# Altium PCB HIVE_SIGHT _PANEL.PcbDoc
Units mil, origin at the board's own origin, x right, y up, seen from the top; angles counter-clockwise.
Board outline 7000 x 5246.04 mil, 4 copper layers (Top, GND, PWR, Bottom), stack 60.394 mil thick; 8 components, 195 nets, 6 pads, 0 vias.
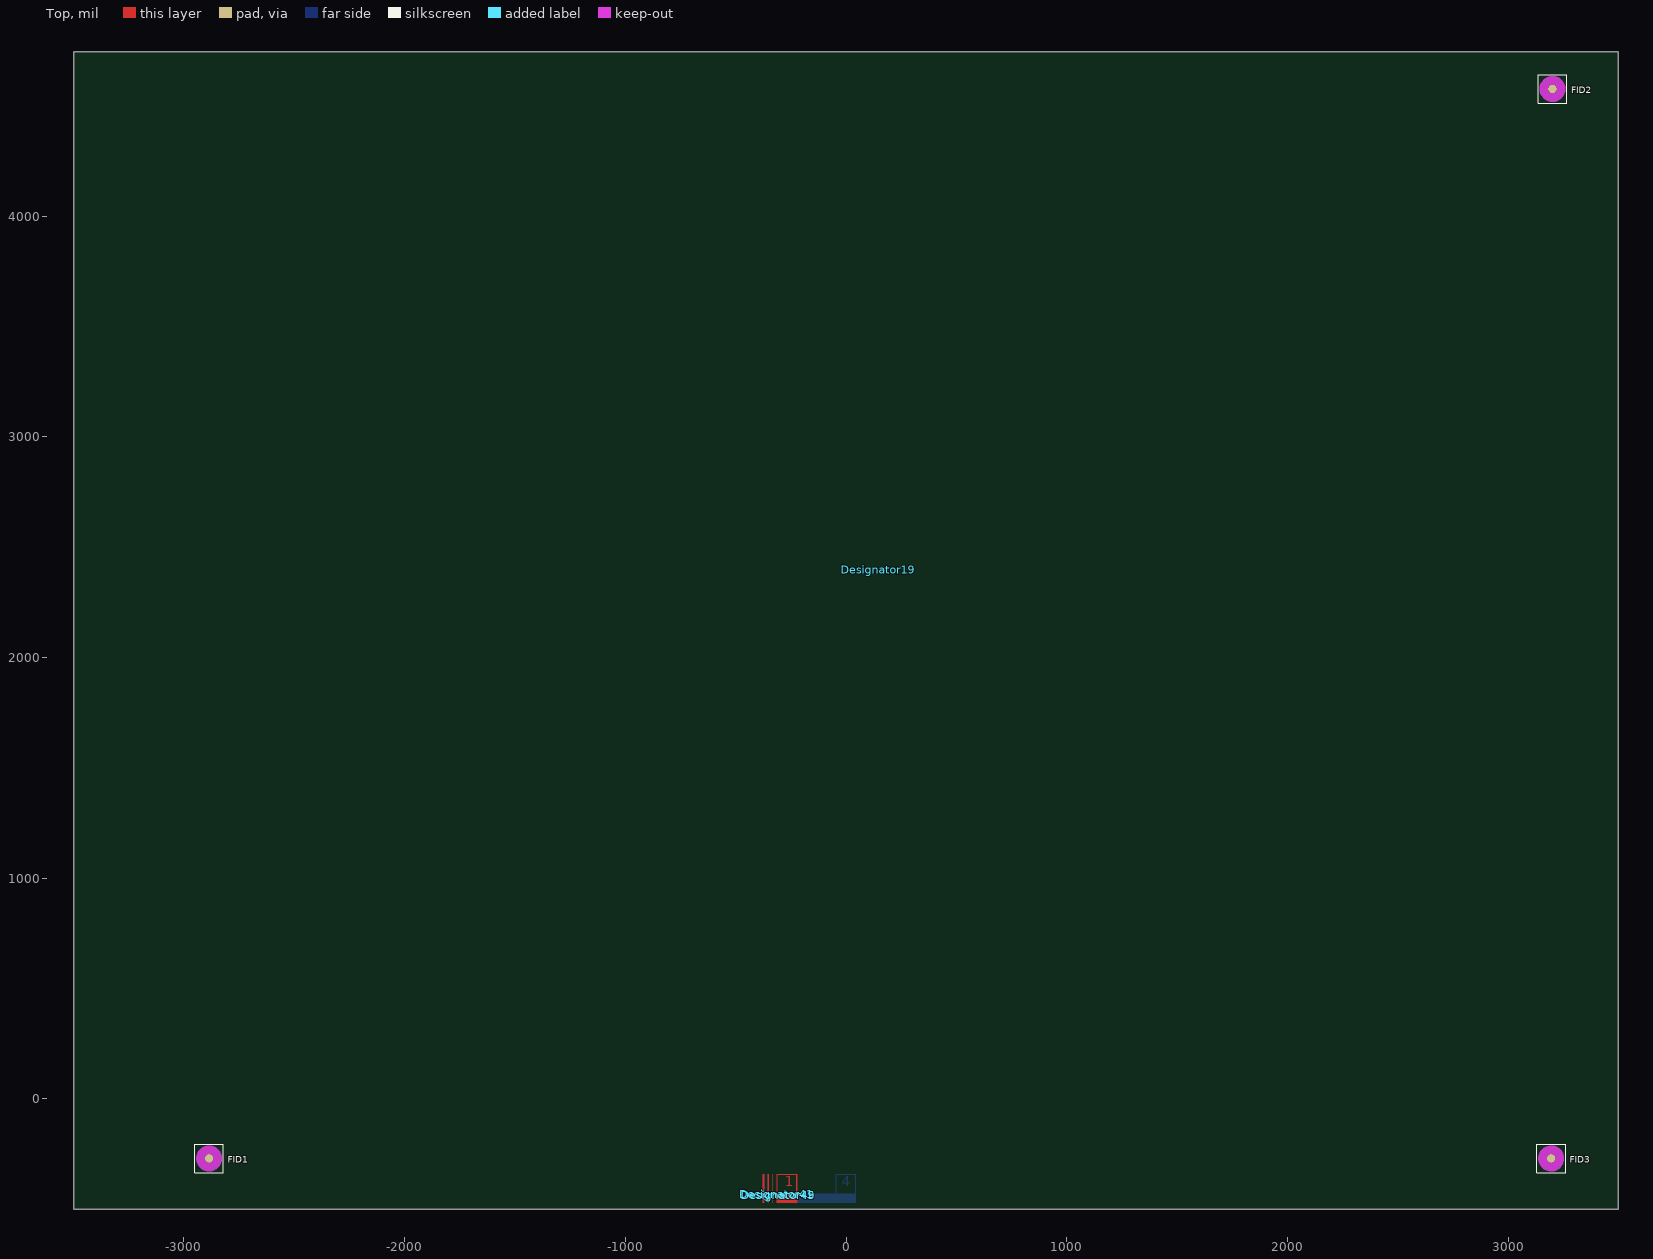
[diagram p0: Top view]
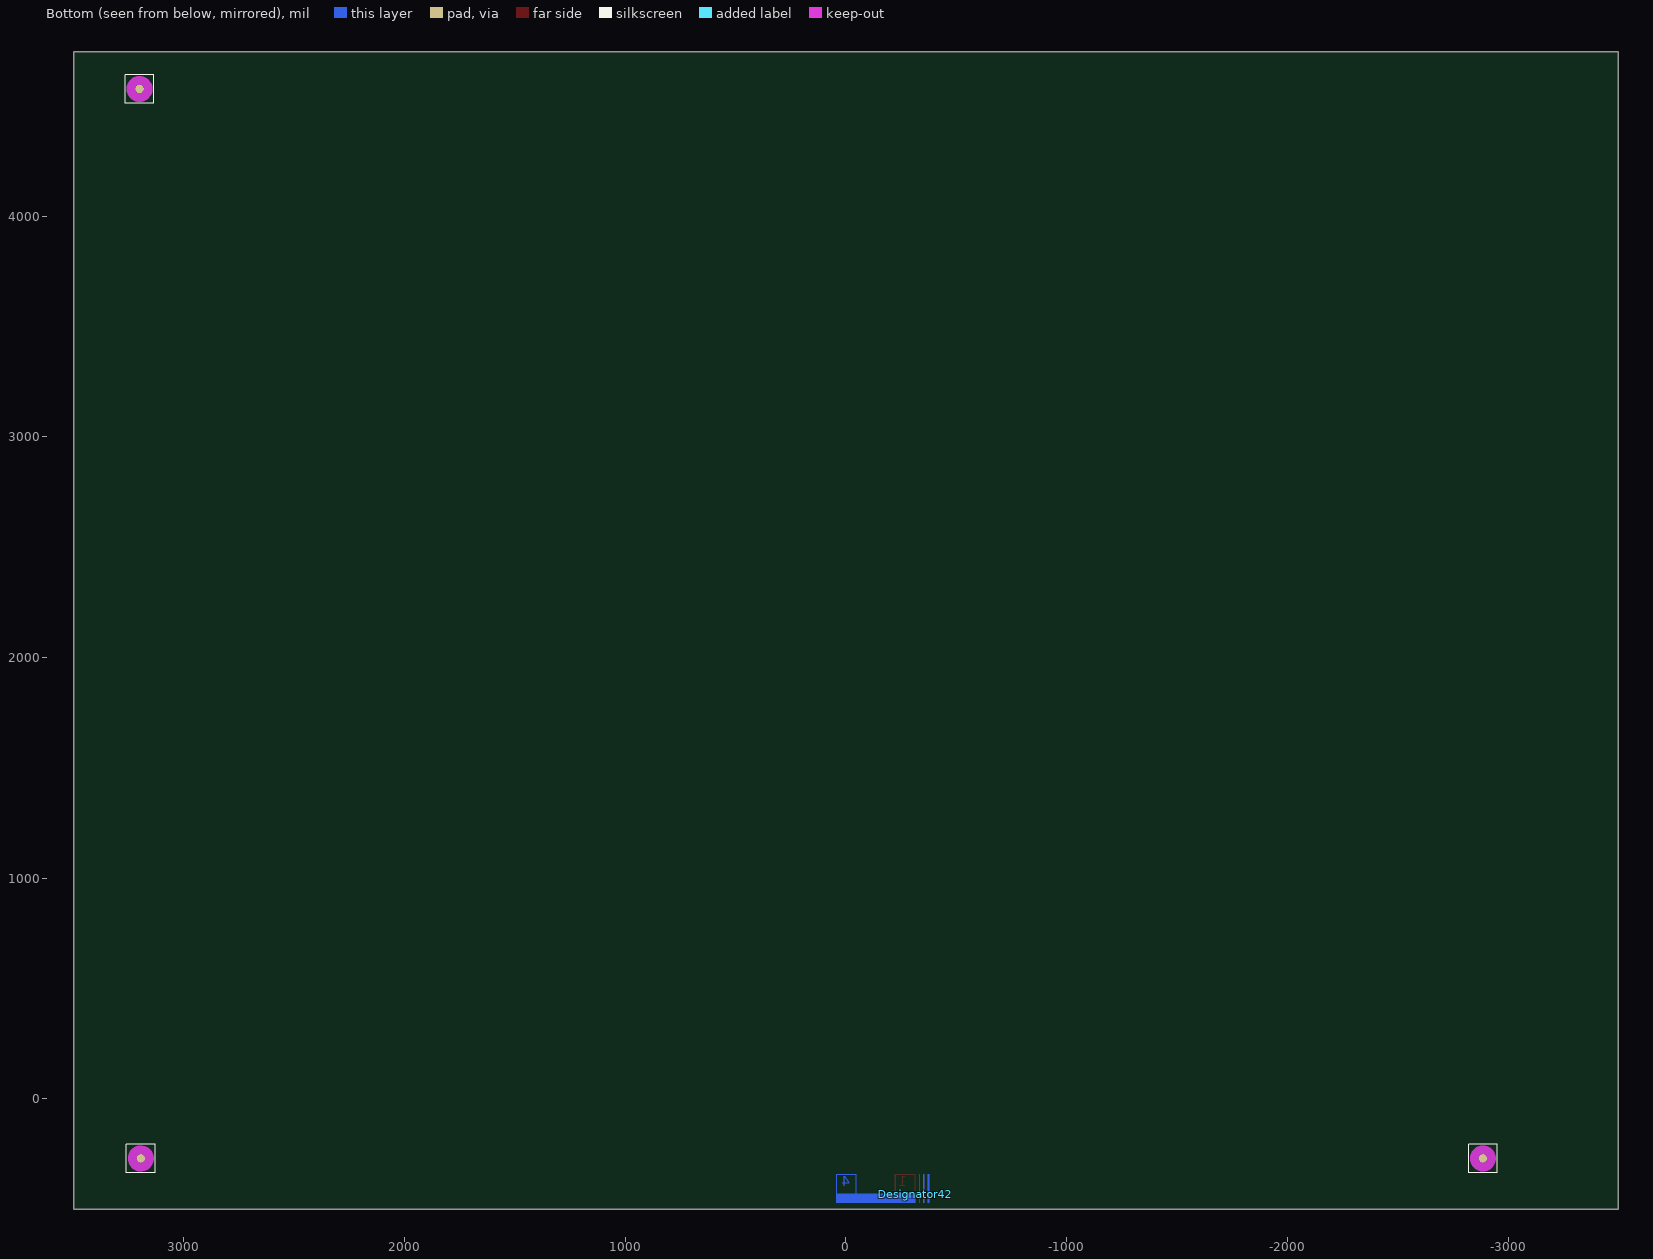
[diagram p1: Bottom view, seen from below]
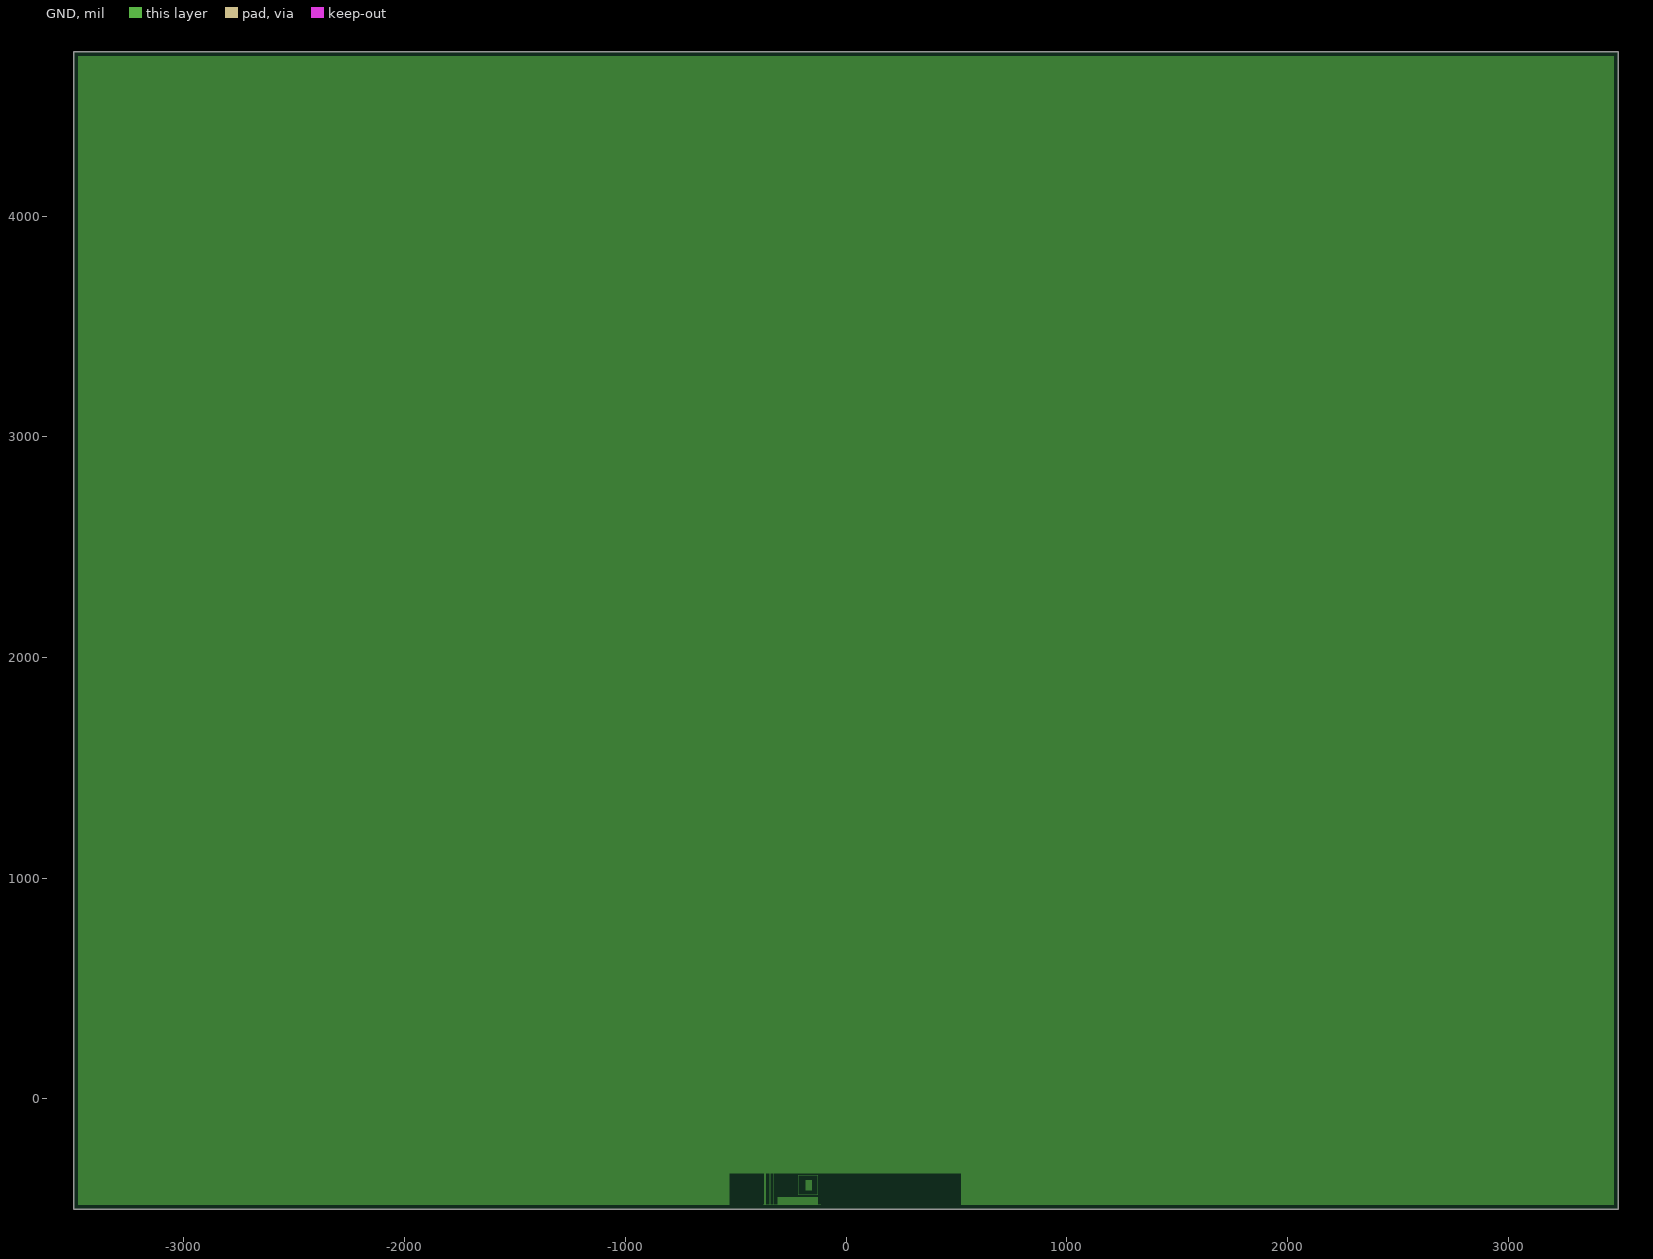
[diagram p2: GND, clearances drawn from the general rule]
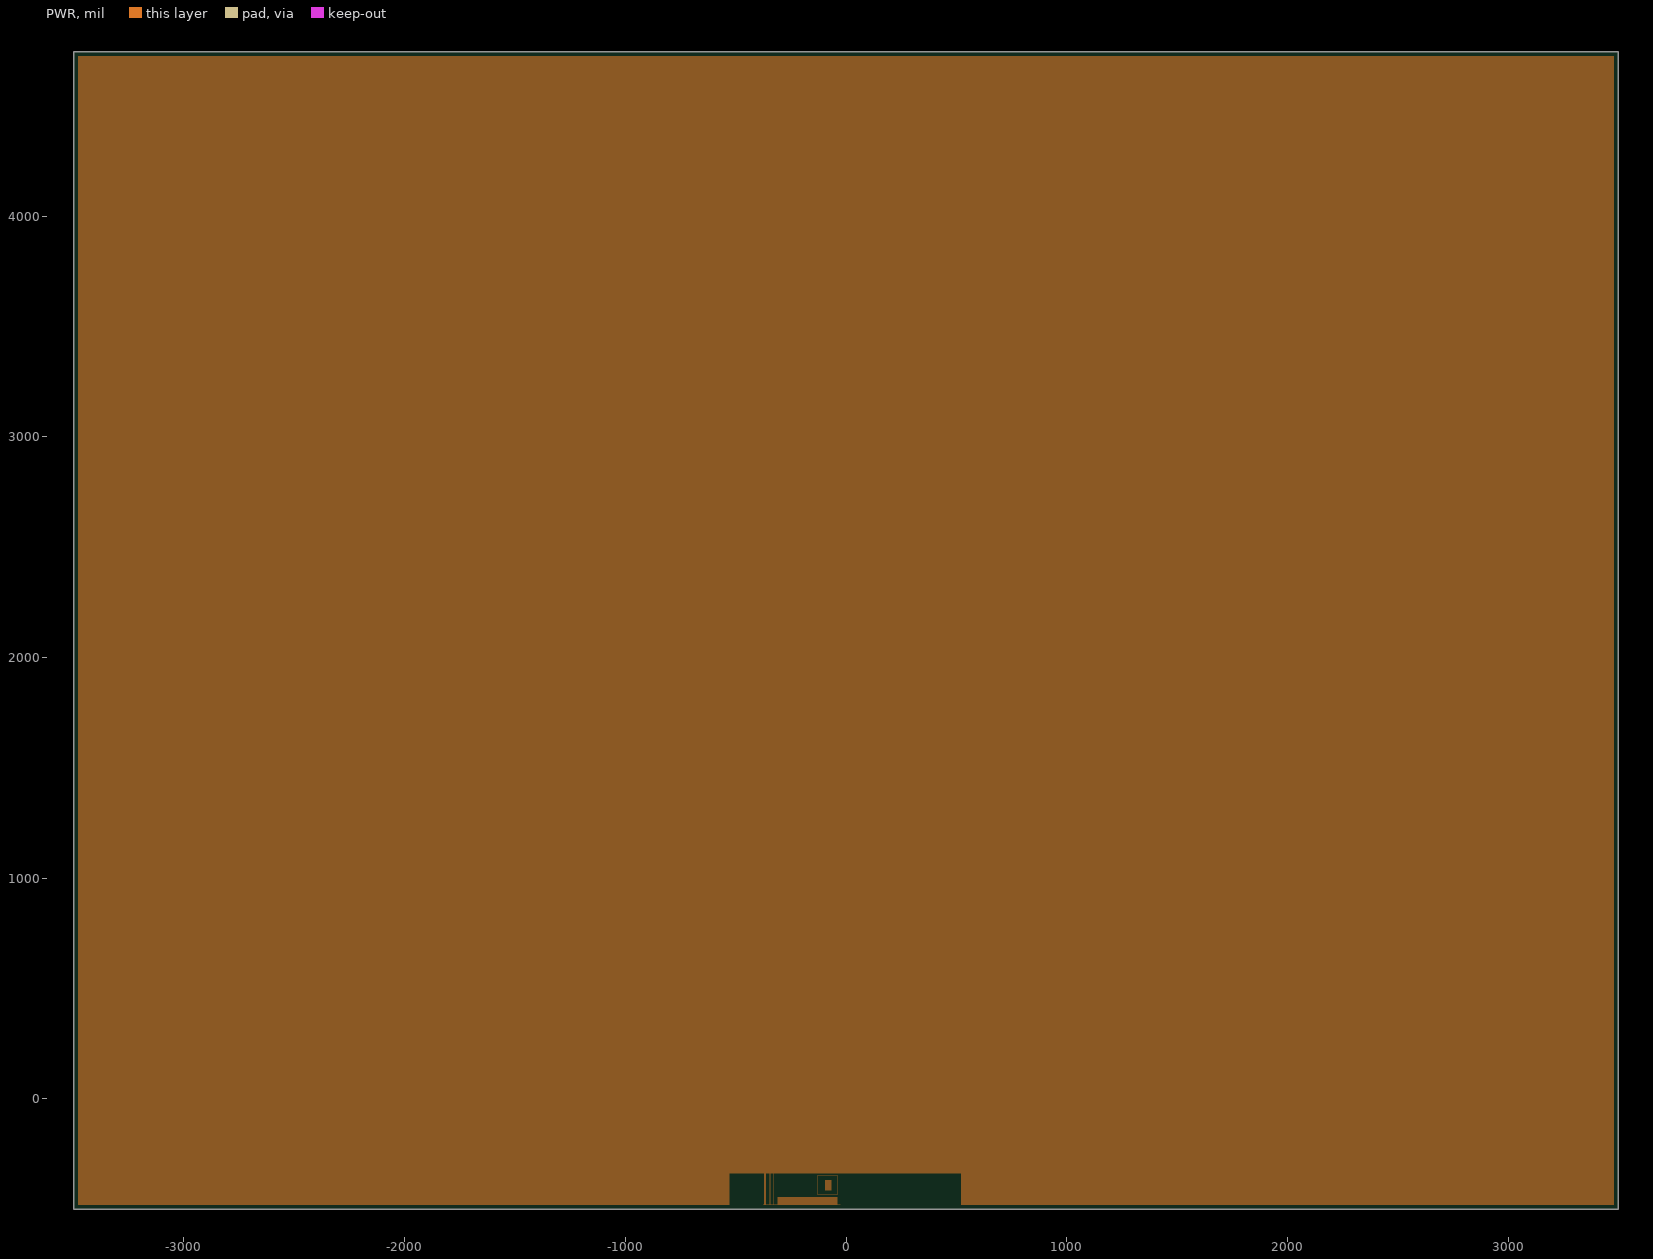
[diagram p3: PWR, clearances drawn from the general rule]

## Layer stack, top to bottom
Top Solder: solder mask 0.394, Solder Resist, Dk 3.5
Top: signal copper 1.378
Dielectric 1: prepreg 4.803, PP-006, Dk 4.2
GND: plane copper 1.378, net GND
Dielectric 2: core 45.276, Core-009, Dk 4.2
PWR: plane copper 1.378, net (Multiple Nets)
Dielectric 3: prepreg 4.803, PP-006, Dk 4.2
Bottom: signal copper 1.378
Bottom Solder: solder mask 0.394, Solder Resist, Dk 3.5

## Board outline
-3500,-500 -3500,4746.04 3500,4746.04 3500,-500

## Design rules (kind name [scope] priority, off if disabled: settings)
BoardOutlineClearance BoardOutlineClearance_NUCLEO [HasFootprint('MOD_NUCLEO-F429ZI')] p1: gap=15 ignorepadtopadclearanceinfootprint=FALSE
BoardOutlineClearance BoardOutlineClearance-Silk [(OnLayer('Bottom Overlay')) OR (OnLayer('Top Overlay'))] p2: gap=3.94 ignorepadtopadclearanceinfootprint=FALSE
BoardOutlineClearance BoardOutlineClearance-Fiducials [InComponentClass('Fiducials')] p3: gap=3.94 ignorepadtopadclearanceinfootprint=FALSE
BoardOutlineClearance BoardOutlineClearance-MouseBites [InComponentClass('MouseBites')] p4: gap=10 ignorepadtopadclearanceinfootprint=FALSE except(0: Arc-SplitContinuation Track-SplitContinuation SMDPad-SplitContinuation THPad-OutlineEdge THPad-CavityEdge THPad-CutoutEdge THPad-SplitBarrior THPad-SplitContinuation Via-SplitContinuation Fill-SplitContinuation Poly-SplitContinuation Region-OutlineEdge Region-CavityEdge Region-CutoutEdge Region-SplitBarrior Region-SplitContinuation Text-SplitContinuation; 20: Arc-OutlineEdge Track-OutlineEdge SMDPad-OutlineEdge Via-OutlineEdge Fill-OutlineEdge Poly-OutlineEdge Text-OutlineEdge)
BoardOutlineClearance [All] p5: gap=19.68 ignorepadtopadclearanceinfootprint=FALSE
Clearance Clearance_1 [IsVia and (NOT InAnyComponent) vs IsSMTPin Or IsThruPin  or IsVia] p1: gap=0 ignorepadtopadclearanceinfootprint=FALSE except(2: SMDPad-Via THPad-Via; 6: Via-Via)
Clearance [All] p2: gap=5 ignorepadtopadclearanceinfootprint=FALSE
ComponentClearance [All] p1: gap=4 collisioncheckmode=3 verticalgap=4 showdistances=FALSE
DiffPairsRouting [All] p1: maxlimit=8 minlimit=8 mostfreqgap=8 toplayer_minwidth=4 toplayer_maxwidth=4 toplayer_prefwidth=4 bottomlayer_minwidth=4 bottomlayer_maxwidth=4 bottomlayer_prefwidth=4 maxuncoupledlength=500
HoleSize [All] p1: absolutevalues=TRUE maxlimit=236.22 minlimit=9.84 maxpercent=80.000 minpercent=20.000
HoleToHoleClearance HoleToHoleClearance_1 [InAnyComponent vs InAnyComponent] p1: gap=8 allowstackedmicrovias=TRUE
HoleToHoleClearance HoleToHoleClearance_Via [IsVia vs IsVia] p2: gap=18 allowstackedmicrovias=TRUE
HoleToHoleClearance [All] p3: gap=18 allowstackedmicrovias=TRUE
MatchedLengths MatchedLengths_CLK [InNetClass('CLK_DW')] p1: tolerance=0.98 checknetsindiffpair=FALSE checkdiffpairvsdiffpair=TRUE checkxsignals=TRUE checkothers=TRUE
MatchedLengths DiffMatching_32k [InDifferentialPair('32K_X')] p2: tolerance=9.84 checknetsindiffpair=TRUE checkdiffpairvsdiffpair=FALSE checkxsignals=FALSE checkothers=FALSE
MatchedLengths DiffMatching_WithinPair [Not InDifferentialPair('32K_X')] p3: tolerance=1 checknetsindiffpair=TRUE checkdiffpairvsdiffpair=FALSE checkxsignals=FALSE checkothers=FALSE
MinimumSolderMaskSliver [All] p1: minsoldermaskwidth=3.94
PlaneClearance [All] p1: clearance=8
PlaneConnect [All] p1: planeconnectstyle=Direct reliefexpansion=20 reliefentries=4 reliefconductorwidth=10 reliefairgap=10
PolygonConnect [All] p1: connectstyle=Direct reliefconductorwidth=10 reliefentries=4 polygonreliefangle="90 Angle" airgapwidth=10
RoutingVias [All] p1: holewidth=19.68 width=39.37 viastyle="Through Hole" minholewidth=11.81 minwidth=19.68 maxholewidth=11.81 maxwidth=19.68
SilkToSilkClearance [All] p1: silktosilkclearance=3.94
SilkToSolderMaskClearance [IsPad] p1: minsilkscreentomaskgap=0.39 clearancetoexposedcopper=FALSE
SolderMaskExpansion SolderMaskExpansion_1 [IsVia AND (NOT InAnyComponent)] p1: expansion=4 istentingtop=TRUE
SolderMaskExpansion [All] p2: expansion=2 istentingtop=FALSE
Width [All] p1: maxlimit=1000 minlimit=8 preferedwidth=8 minimp=50.000000 maximp=50.000000 favimp=50.000000
21 further rules are at their usual default settings.

## Classes and differential pairs
net class CLK_DW: NetC65_1 NetC66_1
component class TOP: MEC?
differential pair W_32K_X: +W_32K_X_P -W_32K_X_N
differential pair XTAL: +XTAL_P -XTAL_N
differential pair USB_D: +USB_D_P -USB_D_N
differential pair RFB: +RFB_P -RFB_N
differential pair RFA: +RFA_P -RFA_N
differential pair 32K_X: +32K_X_P -32K_X_N

## Components (designator, comment, footprint, x,y, rotation, side; value= is the part's Value field where it differs from the comment)
Designator19 "Comment" STN_STENCIL_TOP_FRAMEWORK_420X520MM 146.97,2398.02 r0 top
Designator41 "Comment" LYR-MARKER-SIGNAL-1 -314.38,-432.4 r0 top
Designator42 "Comment" LYR-MARKER-SIGNAL-4 -314.38,-432.4 r0 bottom
Designator45 "Comment" LYR-MARKER-PLANE-2 -307.57,-437.32 r0 top
Designator49 "Comment" LYR-MARKER-PLANE-3 -307.57,-437.32 r0 top
FID1 "Comment" "FID_CIRCLE_1MM - PASTE_MASK" -2886.14,-269.42 r180 top
FID2 "Comment" "FID_CIRCLE_1MM - PASTE_MASK" 3201.16,4576.59 r180 top
FID3 "Comment" "FID_CIRCLE_1MM - PASTE_MASK" 3195.49,-269.42 r180 top

## Footprints (in the part's own frame and the unit in brackets; to place one, negate y for a bottom-side part, rotate by r counter-clockwise, add the part's x,y. Pads: shape width x height; smd on the part's side, far side on the other; paste and mask are expansions set on the pad)
"FID_CIRCLE_1MM - PASTE_MASK" [mm]
  round 1 smd paste-1 mask+1: 1(0,0)
  round 1 smd far side paste-1 mask+1: 2(0,0)
  Top keep-out circle w1: c0,0 r1
  Bottom keep-out circle w1: c0,0 r1
  silkscreen extent -1.65,-1.65 1.65,1.65
LYR-MARKER-PLANE-2 [mil]
  GND region: 177.17,88.58 154.46,88.58 154.46,4.92 177.17,4.92
  GND region: -70.87,-39.37 -64.06,-39.37 -64.06,98.42 -70.87,98.42
  GND region: -54.06,-39.37 -40.4,-39.37 -40.4,98.42 -54.06,98.42
  GND region: -34.4,-39.37 -21.68,-39.37 -21.68,98.42 -34.4,98.42
  GND region: -17.68,-39.37 -4.92,-39.37 -4.92,98.43 -17.68,98.43
  GND region: -4.92,-4.92 88.58,-4.92 88.58,98.43 -4.92,98.43
  GND region: 182.09,-39.37 196.85,-39.37 196.85,98.43 182.09,98.43
  GND region: 187.01,93.5 187.01,98.43 83.66,98.43 83.66,93.5
  GND region: 93.5,4.92 122.18,4.92 122.18,88.58 93.5,88.58
  GND region: 177.17,72.06 177.17,88.58 93.5,88.58 93.5,72.06
  GND region: 93.5,21.73 93.5,4.92 177.16,4.92 177.16,21.73
  GND region: 83.66,-4.92 88.58,-4.92 88.58,98.43 83.66,98.43
  GND region: 187.01,-4.92 187.01,0 83.66,0 83.66,-4.92
LYR-MARKER-PLANE-3 [mil]
  PWR region: 265.75,72.06 265.75,88.58 182.09,88.58 182.09,72.06
  PWR region: -4.92,-4.92 173.21,-4.92 173.21,98.43 -4.92,98.43
  PWR region: -17.68,-39.37 -4.92,-39.37 -4.92,98.42 -17.68,98.42
  PWR region: 172.24,-4.92 177.17,-4.92 177.17,98.43 172.24,98.43
  PWR region: 265.75,88.58 243.65,88.58 243.65,4.92 265.75,4.92
  PWR region: -70.87,-39.37 -64.06,-39.37 -64.06,98.42 -70.87,98.42
  PWR region: 83.66,-4.92 88.58,-4.92 88.58,98.43 83.66,98.43
  PWR region: 182.09,21.73 182.09,4.92 265.75,4.92 265.75,21.73
  PWR region: -54.06,-39.37 -40.4,-39.37 -40.4,98.42 -54.06,98.42
  PWR region: 275.59,93.5 275.59,98.43 172.24,98.43 172.24,93.5
  PWR region: 275.59,-4.92 275.59,0 172.24,0 172.24,-4.92
  PWR region: -34.4,-39.37 -21.68,-39.37 -21.68,98.42 -34.4,98.42
  PWR region: 182.09,4.92 210.85,4.92 210.85,88.58 182.09,88.58
  PWR region: 270.67,-39.37 285.43,-39.37 285.43,98.43 270.67,98.43
LYR-MARKER-SIGNAL-1 [mil]
  Top region: -21.68,-39.37 -17.68,-39.37 -17.68,93.5 -21.68,93.5
  Top region: -40.4,-39.37 -34.4,-39.37 -34.4,93.5 -40.4,93.5
  Top region: -64.06,-39.37 -54.06,-39.37 -54.06,93.5 -64.06,93.5
  Top region: 0,0 4.92,0 4.92,93.5 0,93.5
  Top region: 93.5,88.58 93.5,93.5 0,93.5 0,88.58
  Top region: 93.5,93.5 88.58,93.5 88.58,0 93.5,0
  Top region: 0,4.92 0,-39.37 93.5,-39.37 93.5,4.92
  Top region: 88.58,0 93.5,0 93.5,93.5 88.58,93.5
  Top pour cut-out: -74.8,98.43 -74.8,-39.37 98.42,-39.37 98.43,98.43
LYR-MARKER-SIGNAL-4 [mil]
  Top region: -64.05,39.37 -54.05,39.37 -54.05,-93.5 -64.05,-93.5
  Top region: -40.4,39.37 -34.4,39.37 -34.4,-93.5 -40.4,-93.5
  Top region: -21.68,39.37 -17.68,39.37 -17.68,-93.5 -21.68,-93.5
  Top region: 270.67,-93.5 265.75,-93.5 265.75,0 270.67,0
  Top region: 0,-4.92 0,39.37 359.25,39.37 359.25,-4.92
  Top region: 359.25,-93.5 354.33,-93.5 354.33,0 359.25,0
  Top region: 359.25,-88.58 359.25,-93.5 265.75,-93.5 265.75,-88.58
  Top region: 354.33,0 359.25,0 359.25,-93.5 354.33,-93.5
  Top pour cut-out: -70.87,-98.43 -70.87,39.37 364.17,39.37 364.17,-98.43
STN_STENCIL_TOP_FRAMEWORK_420X520MM [mil] "MEC - STENCIL PASTE FRAMEWORK"
  body extent -10236,-8268 -10157,-8189

## Nets (pads, with @x,y where several pads share a name; then routed paths per layer and width w, separated by ;. In a path a pad name is that pad's centre, name@x,y a point inside that pad or via, vN(x,y) a via of type N, cw(c..) or ccw(c..) an arc to the next point about the centre after c; other vN are vias at no path point)
1V8: 
3V3: 
3V3_INT: 
3V3_NUC: 
3V3_SDIO: 
3V3_WIFI: 
5V_CONN: 
5V_IN: 
5V_NUC: 
5V_OV_G1: 
5V_OV_G2: 
5V_POL: 
5V_POL_G: 
5V_PROT: 
5V_USB: 
32K_X_N: 
32K_X_P: 
ANT_OUT: 
CHIP_PU: 
GND: 
IMU_INT1: 
IMU_INT2: 
IMU_SCL: 
IMU_SDA: 
JTAG_TCK: 
JTAG_TCK_SW: 
JTAG_TDI: 
JTAG_TDI_SW: 
JTAG_TDO: 
JTAG_TDO_SW: 
JTAG_TMS: 
JTAG_TMS_SW: 
LED_RX_A: 
LED_RX_B: 
LED_RX_OK_A: 
LED_RX_OK_B: 
LED_SFD_A: 
LED_SFD_B: 
LED_TX_A: 
LED_TX_B: 
LNA_IN: 
NetC6_1: 
NetC7_1: 
NetC8_1: 
NetC9_1: 
NetC10_2: 
NetC15_2: 
NetC16_1: 
NetC18_1: 
NetC19_1: 
NetC20_2: 
NetC27_1: 
NetC28_1: 
NetC30_1: 
NetC32_2: 
NetC33_1: 
NetC34_1: 
NetC36_1: 
NetC37_1: 
NetC38_1: 
NetC39_1: 
NetC40_2: 
NetC45_2: 
NetC47_1: 
NetC48_2: 
NetC54_1: 
NetC55_1: 
NetC57_1: 
NetC58_1: 
NetC60_1: 
NetC62_2: 
NetC63_1: 
NetC64_1: 
NetC65_1: 
NetC65_2: 
NetC66_1: 
NetC72_1: 
NetC72_2: 
NetC74_2: 
NetC83_1: 
NetC83_2: 
NetD3_A: 
NetD4_A: 
NetD5_A: 
NetD5_K: 
NetD6_A: 
NetD7_A: 
NetD8_A: 
NetD9_A: 
NetD10_A: 
NetD11_A: 
NetD12_A: 
NetD13_A: 
NetD17_A: 
NetD19_A: 
NetD20_A: 
NetD21_A: 
NetJ7_1: 
NetJ8_1: 
NetR14_2: 
NetR21_2: 
NetR23_1: 
NetR23_2: 
NetR25_1: 
NetR26_2: 
NetR34_1: 
NetR38_1: 
NetR38_2: 
NetR39_2: 
NetR40_2: 
NetR41_1: 
NetR46_1: 
NetR46_2: 
NetR47_2: 
NetR48_1: 
NetR49_1: 
NetR50_1: 
NetR51_1: 
NetU1_3: 
NetU2_1: 
NetU3_21: 
NetU3_23: 
NetU3_24: 
NetU3_29: 
NetU3_30: 
NetU3_33: 
NetU3_34: 
NetU3_39: 
NetU3_40: 
NetU3_41: 
NetU3_45: 
NetU4_21: 
NetU4_23: 
NetU4_24: 
NetU4_30: 
NetU4_33: 
NetU4_34: 
NetU4_45: 
NetU6_2: 
NetU7_3: 
NetU7_6: 
NetU9_16: 
NetU9_23: 
NetU9_27: 
NetU11_12: 
NetU12_3: 
NetU12_7: 
NetU13_CN7-17: 
NetU13_CN8-6: 
NetU13_CN8-8: 
NetU13_CN8-10: 
NetU13_CN9-1: 
NetU13_CN9-2: 
NetU13_CN9-3: 
RFA_N: 
RFA_P: 
RFB_N: 
RFB_P: 
RST_A#: 
RST_B#: 
RXT_USB: 
SHIELD_USB: 
SPI_CLK: 
SPI_CS0: 
SPI_D: 
SPI_HD: 
SPI_Q: 
SPI_WP: 
TXT_USB: 
UART_SEL: 
UART_USB_RX: 
UART_USB_TX: 
USB_D_N: 
USB_D_P: 
USER_LED: 
VDDCLK_A: 
VDDCLK_B: 
VDDVCO_A: 
VDDVCO_B: 
VSPI_CLK: 
VSPI_CS0: 
VSPI_D: 
VSPI_Q: 
W_32K_X_N: 
W_32K_X_P: 
W_CHIP_PU: 
W_USER_LED: 
WROOM_Rx: 
WROOM_TCK: 
WROOM_TDI: 
WROOM_TDO: 
WROOM_TMS: 
WROOM_Tx: 
XTAL_N: 
XTAL_P: 
pads on no net: FID1.1 FID1.2 FID2.1 FID2.2 FID3.1 FID3.2
copper on no net: | length 483806.2
  Top w1: 13525.28,-1947.61 16906.16,1433.27 ; 13525.28,-1887.61 16846.16,1433.27 ; 13525.28,-1827.61 16786.16,1433.27 ; 13525.28,-1767.61 16726.16,1433.27 ; 13525.28,-1707.61 16666.16,1433.27 ; 13525.28,-1647.61 16606.16,1433.27 ; 13525.28,-1587.61 16546.16,1433.27 ; 13525.28,-1527.61 16486.16,1433.27 ; 13525.28,-1467.61 16426.16,1433.27 ; 13525.28,-1407.61 16366.16,1433.27 ; 13525.28,-1347.61 16306.16,1433.27 ; 13525.28,-1287.61 16246.16,1433.27 ; 13525.28,-1227.61 16186.16,1433.27 ; 13525.28,-1167.61 16126.16,1433.27 ; 13525.28,-1107.61 16066.16,1433.27 ; 13525.28,-1047.61 16006.16,1433.27 ; 13525.28,-987.61 15946.16,1433.27 ; 13525.28,-927.61 15886.16,1433.27 ; 13525.28,-867.61 15826.16,1433.27 ; 13525.28,-807.61 15766.16,1433.27 ; 13525.28,-747.61 15706.16,1433.27 ; 13525.28,-687.61 15646.16,1433.27 ; 13525.28,-627.61 15586.16,1433.27 ; 13525.28,-567.61 15526.16,1433.27 ; 13525.28,-507.61 15466.16,1433.27 ; 13525.28,-447.61 15406.16,1433.27 ; 13525.28,-387.61 15346.16,1433.27 ; 13525.28,-327.61 15286.16,1433.27 ; 13525.28,-267.61 15226.16,1433.27 ; 13525.28,-207.61 15166.16,1433.27 ; 13525.28,-147.61 15106.16,1433.27 ; 13525.28,-87.61 15046.16,1433.27 ; 13525.28,-27.61 14986.16,1433.27 ; 13525.28,32.39 14926.16,1433.27 ; 13525.28,92.39 14866.16,1433.27 ; 13525.28,152.39 14806.16,1433.27 ; 13525.28,212.39 14746.16,1433.27 ; 13525.28,272.39 14686.16,1433.27 ; 13525.28,332.39 14626.16,1433.27 ; 13525.28,392.39 14566.16,1433.27 ; 13525.28,452.39 14506.16,1433.27 ; 13525.28,512.39 14446.16,1433.27 ; 13525.28,572.39 14386.16,1433.27 ; 13525.28,632.39 14326.16,1433.27 ; 13525.28,692.39 14266.16,1433.27 ; 13525.28,752.39 14206.16,1433.27 ; 13525.28,812.39 14146.16,1433.27 ; 13525.28,872.39 14086.16,1433.27 ; 13525.28,932.39 14026.16,1433.27 ; 13525.28,992.39 13966.16,1433.27 ; 13525.28,1052.39 13906.16,1433.27 ; 13525.28,1112.39 13846.16,1433.27 ; 13525.28,1172.39 13786.16,1433.27 ; 13525.28,1232.39 13726.16,1433.27 ; 13525.28,1292.39 13666.16,1433.27 ; 13525.28,1352.39 13606.16,1433.27 ; 13525.28,1412.39 13546.16,1433.27 ; 13563.55,-1969.35 16966.16,1433.27 ; 13623.55,-1969.35 17026.16,1433.27 ; 13683.55,-1969.35 17086.16,1433.27 ; 13743.55,-1969.35 17146.16,1433.27 ; 13803.55,-1969.35 17206.16,1433.27 ; 13863.55,-1969.35 17266.16,1433.27 ; 13923.55,-1969.35 17326.16,1433.27 ; 13983.55,-1969.35 17386.16,1433.27 ; 14043.55,-1969.35 17446.16,1433.27 ; 14103.55,-1969.35 17506.16,1433.27 ; 14163.55,-1969.35 17566.16,1433.27 ; 14223.55,-1969.35 17626.16,1433.27 ; 14283.55,-1969.35 17686.16,1433.27 ; 14343.55,-1969.35 17746.16,1433.27 ; 14403.55,-1969.35 17806.16,1433.27 ; 14463.55,-1969.35 17866.16,1433.27 ; 14523.55,-1969.35 17926.16,1433.27 ; 14583.55,-1969.35 17986.16,1433.27 ; 14643.55,-1969.35 18046.16,1433.27 ; 14703.55,-1969.35 18064.09,1391.2 ; 14763.55,-1969.35 18064.09,1331.2 ; 14823.55,-1969.35 18064.09,1271.2 ; 14883.55,-1969.35 18064.09,1211.2 ; 14943.55,-1969.35 18064.09,1151.2 ; 15003.55,-1969.35 18064.09,1091.2 ; 15063.55,-1969.35 18064.09,1031.2 ; 15123.55,-1969.35 18064.09,971.2 ; 15183.55,-1969.35 18064.09,911.2 ; 15243.55,-1969.35 18064.09,851.2 ; 15303.55,-1969.35 18064.09,791.2 ; 15363.55,-1969.35 18064.09,731.2 ; 15423.55,-1969.35 18064.09,671.2 ; 15483.55,-1969.35 18064.09,611.2 ; 15543.55,-1969.35 18064.09,551.2 ; 15603.55,-1969.35 18064.09,491.2 ; 15663.55,-1969.35 18064.09,431.2 ; 15723.55,-1969.35 18064.09,371.2 ; 15783.55,-1969.35 18064.09,311.2 ; 15843.55,-1969.35 18064.09,251.2 ; 15903.55,-1969.35 18064.09,191.2 ; 15963.55,-1969.35 18064.09,131.2 ; 16023.55,-1969.35 18064.09,71.2 ; 16083.55,-1969.35 18064.09,11.2 ; 16143.55,-1969.35 18064.09,-48.8 ; 16203.55,-1969.35 18064.09,-108.8 ; 16263.55,-1969.35 18064.09,-168.8 ; 16323.55,-1969.35 18064.09,-228.8 ; 16383.55,-1969.35 18064.09,-288.8 ; 16443.55,-1969.35 18064.09,-348.8 ; 16503.55,-1969.35 18064.09,-408.8 ; 16563.55,-1969.35 18064.09,-468.8 ; 16623.55,-1969.35 18064.09,-528.8 ; 16683.55,-1969.35 18064.09,-588.8 ; 16743.55,-1969.35 18064.09,-648.8 ; 16803.55,-1969.35 18064.09,-708.8 ; 16863.55,-1969.35 18064.09,-768.8 ; 16923.55,-1969.35 18064.09,-828.8 ; 16944.4,1483.05 17044.09,1582.73 17164.09,1702.73 17284.09,1822.73 17404.09,1942.73 17524.09,2062.73 17644.09,2182.73 17764.09,2302.73 17884.09,2422.73 18004.09,2542.73 18064.09,2602.73 ; 16944.4,1543.05 16984.09,1582.73 17104.09,1702.73 17224.09,1822.73 17344.09,1942.73 17464.09,2062.73 17584.09,2182.73 17704.09,2302.73 17824.09,2422.73 17944.09,2542.73 18064.09,2662.73 ; 16944.4,1603.05 17044.09,1702.73 17164.09,1822.73 17284.09,1942.73 17404.09,2062.73 17524.09,2182.73 17644.09,2302.73 17764.09,2422.73 17884.09,2542.73 18004.09,2662.73 18064.09,2722.73 ; 16944.4,1663.05 16984.09,1702.73 17104.09,1822.73 17224.09,1942.73 17344.09,2062.73 17464.09,2182.73 17584.09,2302.73 17704.09,2422.73 17824.09,2542.73 17944.09,2662.73 18064.09,2782.73 ; 16944.4,1723.05 17044.09,1822.73 17164.09,1942.73 17284.09,2062.73 17404.09,2182.73 17524.09,2302.73 17644.09,2422.73 17764.09,2542.73 17884.09,2662.73 18004.09,2782.73 ; 16944.4,1783.05 16984.09,1822.73 17104.09,1942.73 17224.09,2062.73 17344.09,2182.73 17464.09,2302.73 17584.09,2422.73 17704.09,2542.73 17824.09,2662.73 17944.09,2782.73 ; 16944.4,1843.05 17044.09,1942.73 17164.09,2062.73 17284.09,2182.73 17404.09,2302.73 17524.09,2422.73 17644.09,2542.73 17764.09,2662.73 17884.09,2782.73 ; 16944.4,1903.05 16984.09,1942.73 17104.09,2062.73 17224.09,2182.73 17344.09,2302.73 17464.09,2422.73 17584.09,2542.73 17704.09,2662.73 17824.09,2782.73 ; 16944.4,1963.05 17044.09,2062.73 17164.09,2182.73 17284.09,2302.73 17404.09,2422.73 17524.09,2542.73 17644.09,2662.73 17764.09,2782.73 ; 16944.4,2023.05 16984.09,2062.73 17104.09,2182.73 17224.09,2302.73 17344.09,2422.73 17464.09,2542.73 17584.09,2662.73 17704.09,2782.73 ; 16944.4,2083.05 17044.09,2182.73 17164.09,2302.73 17284.09,2422.73 17404.09,2542.73 17524.09,2662.73 17644.09,2782.73 ; 16944.4,2143.05 16984.09,2182.73 17104.09,2302.73 17224.09,2422.73 17344.09,2542.73 17464.09,2662.73 17584.09,2782.73 ; 16944.4,2203.05 17044.09,2302.73 17164.09,2422.73 17284.09,2542.73 17404.09,2662.73 17524.09,2782.73 ; 16944.4,2263.05 16984.09,2302.73 17104.09,2422.73 17224.09,2542.73 17344.09,2662.73 17464.09,2782.73 ; 16944.4,2323.05 17044.09,2422.73 17164.09,2542.73 17284.09,2662.73 17404.09,2782.73 ; 16944.4,2383.05 16984.09,2422.73 17104.09,2542.73 17224.09,2662.73 17344.09,2782.73 ; 16944.4,2443.05 17044.09,2542.73 17164.09,2662.73 17284.09,2782.73 ; 16944.4,2503.05 16984.09,2542.73 17104.09,2662.73 17224.09,2782.73 ; 16944.4,2563.05 17044.09,2662.73 17164.09,2782.73 ; 16944.4,2623.05 16984.09,2662.73 17104.09,2782.73 ; 16944.4,2683.05 17044.09,2782.73 ; 16944.4,2743.05 16984.09,2782.73 ; 16983.55,-1969.35 18064.09,-888.8 ; 16984.09,1462.73 17104.09,1582.73 17224.09,1702.73 17344.09,1822.73 17464.09,1942.73 17584.09,2062.73 17704.09,2182.73 17824.09,2302.73 17944.09,2422.73 18064.09,2542.73 ; 17043.55,-1969.35 18064.09,-948.8 ; 17044.09,1462.73 17164.09,1582.73 17284.09,1702.73 17404.09,1822.73 17524.09,1942.73 17644.09,2062.73 17764.09,2182.73 17884.09,2302.73 18004.09,2422.73 18064.09,2482.73 ; 17103.55,-1969.35 18064.09,-1008.8 ; 17104.09,1462.73 17224.09,1582.73 17344.09,1702.73 17464.09,1822.73 17584.09,1942.73 17704.09,2062.73 17824.09,2182.73 17944.09,2302.73 18064.09,2422.73 ; 17163.55,-1969.35 18064.09,-1068.8 ; 17164.09,1462.73 17284.09,1582.73 17404.09,1702.73 17524.09,1822.73 17644.09,1942.73 17764.09,2062.73 17884.09,2182.73 18004.09,2302.73 18064.09,2362.73 ; 17223.55,-1969.35 18064.09,-1128.8 ; 17224.09,1462.73 17344.09,1582.73 17464.09,1702.73 17584.09,1822.73 17704.09,1942.73 17824.09,2062.73 17944.09,2182.73 18064.09,2302.73 ; 17283.55,-1969.35 18064.09,-1188.8 ; 17284.09,1462.73 17404.09,1582.73 17524.09,1702.73 17644.09,1822.73 17764.09,1942.73 17884.09,2062.73 18004.09,2182.73 18064.09,2242.73 ; 17343.55,-1969.35 18064.09,-1248.8 ; 17344.09,1462.73 17464.09,1582.73 17584.09,1702.73 17704.09,1822.73 17824.09,1942.73 17944.09,2062.73 18064.09,2182.73 ; 17403.55,-1969.35 18064.09,-1308.8 ; 17404.09,1462.73 17524.09,1582.73 17644.09,1702.73 17764.09,1822.73 17884.09,1942.73 18004.09,2062.73 18064.09,2122.73 ; 17463.55,-1969.35 18064.09,-1368.8 ; 17464.09,1462.73 17584.09,1582.73 17704.09,1702.73 17824.09,1822.73 17944.09,1942.73 18064.09,2062.73 ; 17523.55,-1969.35 18064.09,-1428.8 ; 17524.09,1462.73 17644.09,1582.73 17764.09,1702.73 17884.09,1822.73 18004.09,1942.73 18064.09,2002.73 ; 17583.55,-1969.35 18064.09,-1488.8 ; 17584.09,1462.73 17704.09,1582.73 17824.09,1702.73 17944.09,1822.73 18064.09,1942.73 ; 17643.55,-1969.35 18064.09,-1548.8 ; 17644.09,1462.73 17764.09,1582.73 17884.09,1702.73 18004.09,1822.73 18064.09,1882.73 ; 17703.55,-1969.35 18064.09,-1608.8 ; 17704.09,1462.73 17824.09,1582.73 17944.09,1702.73 18064.09,1822.73 ; 17763.55,-1969.35 18064.09,-1668.8 ; 17764.09,1462.73 17884.09,1582.73 18004.09,1702.73 18064.09,1762.73 ; 17823.55,-1969.35 18064.09,-1728.8 ; 17824.09,1462.73 17944.09,1582.73 18064.09,1702.73 ; 17883.55,-1969.35 18064.09,-1788.8 ; 17884.09,1462.73 18004.09,1582.73 18064.09,1642.73 ; 17943.55,-1969.35 18064.09,-1848.8 ; 17944.09,1462.73 18064.09,1582.73 ; 18003.55,-1969.35 18064.09,-1908.8 ; 18004.09,1462.73 18064.09,1522.73
  Top w15: 13525.28,1582.73 13935.2,1582.73 14864.94,1582.73 15724.71,1582.73 16374.54,1582.73 16944.4,1582.73 18064.09,1582.73 ; 13525.28,1702.73 13935.2,1702.73 14864.94,1702.73 15724.71,1702.73 16374.54,1702.73 16944.4,1702.73 18064.09,1702.73 ; 13525.28,1822.73 13935.2,1822.73 14864.94,1822.73 15724.71,1822.73 16374.54,1822.73 16944.4,1822.73 18064.09,1822.73 ; 13525.28,1942.73 13935.2,1942.73 14864.94,1942.73 15724.71,1942.73 16374.54,1942.73 16944.4,1942.73 18064.09,1942.73 ; 13525.28,2062.73 13935.2,2062.73 14864.94,2062.73 15724.71,2062.73 16374.54,2062.73 16944.4,2062.73 18064.09,2062.73 ; 13525.28,2182.73 13935.2,2182.73 14864.94,2182.73 15724.71,2182.73 16374.54,2182.73 16944.4,2182.73 18064.09,2182.73 ; 13525.28,2302.73 13935.2,2302.73 14864.94,2302.73 15724.71,2302.73 16374.54,2302.73 16944.4,2302.73 18064.09,2302.73 ; 13525.28,2422.73 13935.2,2422.73 14864.94,2422.73 15724.71,2422.73 16374.54,2422.73 16944.4,2422.73 18064.09,2422.73 ; 13525.28,2542.73 13935.2,2542.73 14864.94,2542.73 15724.71,2542.73 16374.54,2542.73 16944.4,2542.73 18064.09,2542.73 ; 13525.28,2662.73 13935.2,2662.73 14864.94,2662.73 15724.71,2662.73 16374.54,2662.73 16944.4,2662.73 18064.09,2662.73 ; 13525.28,2782.73 18064.09,2782.73 ; 13935.2,2902.73 13935.2,1462.73 ; 14864.94,2902.73 14864.94,1462.73 ; 15724.71,2902.73 15724.71,1462.73 ; 16374.54,2902.73 16374.54,1462.73 ; 16944.4,2902.73 16944.4,1462.73 ; 13935.2,1462.73 13525.28,1462.73 13525.28,2902.73 18064.09,2902.73 18064.09,1462.73 16944.4,1462.73 ; 13935.2,1462.73 14864.94,1462.73 ; 14864.94,1462.73 15724.71,1462.73 ; 15724.71,1462.73 16374.54,1462.73 ; 16374.54,1462.73 16944.4,1462.73 ; 13525.28,-1968.8 13525.28,1432.73 18064.09,1432.73 18064.09,-1968.8 13525.28,-1968.8

## Polygon pours and split planes (outlines as drawn)
GND on GND (split plane): 3479.9,-479.9 519.7,-479.9 519.7,-338.76 -112.54,-338.76 -112.54,-338.89 -218.98,-338.89 -223.91,-338.89 -312.49,-338.89 -325.25,-338.89 -325.25,-476.69 -312.49,-476.69 -312.49,-442.24 -223.91,-442.24 -125.48,-442.24 -125.48,-476.69 -112.54,-476.69 -112.54,-479.9 -377.97,-479.9 -377.97,-476.69 -371.62,-476.69 -371.62,-338.89 -378.43,-338.89 -526.13,-338.89 -526.13,-479.9 -3479.9,-479.9 -3479.9,4725.94 3479.9,4725.94
GND on GND (split plane): -125.48,-437.32 -218.98,-437.32 -218.98,-343.81 -125.48,-343.81
3V3 on PWR (split plane): 3479.9,-479.9 519.7,-479.9 519.7,-338.76 -23.62,-338.76 -23.62,-338.89 -31.98,-338.89 -130.4,-338.89 -135.32,-338.89 -218.98,-338.89 -223.91,-338.89 -312.49,-338.89 -325.25,-338.89 -325.25,-476.69 -312.49,-476.69 -312.49,-442.24 -36.9,-442.24 -36.9,-476.69 -23.62,-476.69 -23.62,-479.9 -377.97,-479.9 -377.97,-476.69 -371.62,-476.69 -371.62,-338.89 -526.13,-338.89 -526.13,-479.9 -3479.9,-479.9 -3479.9,4725.94 3479.9,4725.94
3V3 on PWR (split plane): -36.9,-437.32 -130.4,-437.32 -130.4,-343.81 -36.9,-343.81

## Other copper
Top:
  text "LAYER 1: TOP" at 10897.52,5313.35 h100
  text "Layer" at 13595.28,2812.73 h60
  text "Name" at 14005.2,2812.73 h60
  text "Material" at 14934.94,2812.73 h60
  text "Thickness" at 15794.71,2812.73 h60
  text "Constant" at 16444.54,2812.73 h60
  text "Board Layer Stack" at 17014.4,2812.73 h60
  text "Top Overlay" at 14005.2,2692.73 h60
  text "Top Solder" at 14005.2,2572.73 h60
  text "Solder Resist" at 14934.94,2572.73 h60
  text "0.39mil" at 15794.71,2572.73 h60
  text "3.5" at 16444.54,2572.73 h60
  text "1" at 13595.28,2452.73 h60
  text "Top" at 14005.2,2452.73 h60
  text "Copper" at 14934.94,2452.73 h60
  text "1.38mil" at 15794.71,2452.73 h60
  text "Dielectric 1" at 14005.2,2332.73 h60
  text "PP-006" at 14934.94,2332.73 h60
  text "4.80mil" at 15794.71,2332.73 h60
  text "4.2" at 16444.54,2332.73 h60
  text "2" at 13595.28,2212.73 h60
  text "GND" at 14005.2,2212.73 h60
  text "Copper" at 14934.94,2212.73 h60
  text "1.38mil" at 15794.71,2212.73 h60
  text "Dielectric 2" at 14005.2,2092.73 h60
  text "Core-009" at 14934.94,2092.73 h60
  text "45.28mil" at 15794.71,2092.73 h60
  text "4.2" at 16444.54,2092.73 h60
  text "3" at 13595.28,1972.73 h60
  text "PWR" at 14005.2,1972.73 h60
  text "Copper" at 14934.94,1972.73 h60
  text "1.38mil" at 15794.71,1972.73 h60
  text "Dielectric 3" at 14005.2,1852.73 h60
  text "PP-006" at 14934.94,1852.73 h60
  text "4.80mil" at 15794.71,1852.73 h60
  text "4.2" at 16444.54,1852.73 h60
  text "4" at 13595.28,1732.73 h60
  text "Bottom" at 14005.2,1732.73 h60
  text "Copper" at 14934.94,1732.73 h60
  text "1.38mil" at 15794.71,1732.73 h60
  text "Bottom Solder" at 14005.2,1612.73 h60
  text "Solder Resist" at 14934.94,1612.73 h60
  text "0.39mil" at 15794.71,1612.73 h60
  text "3.5" at 16444.54,1612.73 h60
  text "Bottom Overlay" at 14005.2,1492.73 h60
Bottom:
  text "LAYER 4: BOTTOM" at 10897.52,4800.87 h100
GND (plane layer: these items are gaps in the copper):
  rectangle: -526.13,-493.57 -377.97,-338.89
  rectangle: -112.54,-493.44 519.7,-338.76
  text "LAYER 2: GND" at 10897.52,5142.52 h100
PWR (plane layer: these items are gaps in the copper):
  rectangle: -526.13,-493.57 -377.97,-338.89
  rectangle: -23.62,-493.44 519.7,-338.76
  text "LAYER 3: PWR" at 10897.52,4971.7 h100

## Silkscreen, mask and mechanical layers (free items; w line width, h text height)
Top Overlay:
  text "TOP SILKSCREEN" at 10897.52,5655 h100
Bottom Overlay:
  text "BOTTOM SILKSCREEN" at 10897.52,4459.22 h100
Top Paste:
  text "TOP PASTEMASK" at 10897.52,3434.27 h100
Bottom Paste:
  text "BOTTOM PASTEMASK" at 10897.52,2580.15 h100
Top Solder:
  text "TOP SOLDERMASK" at 10897.52,5484.17 h100
Bottom Solder:
  text "BOTTOM SOLDERMASK" at 10897.52,4630.05 h100
Top Assembly:
  text "TOP ASSEMBLY" at 10897.52,3263.45 h100
Bottom Assembly:
  text "BOTTOM ASSEMBLY" at 10897.52,2409.32 h100
Top Designators:
  text "TOP DESIGNATORS" at 10897.52,3092.62 h100
Bottom Designators:
  text "BOTTOM DESIGNATORS" at 10897.52,2067.67 h100
Board Outline:
  text "BOARD OUTLINE" at 10897.52,4288.4 h100
Panel Outline:
  the board outline again, w5
  text "PANEL OUTLINE" at 10897.52,4117.57 h100
Route Tool Path:
  lines w100: -475,-500 475,-500
  text "ROUTE TOOL PATH" at 10897.52,3946.75 h100
  text "100 MIL ROUTER" at -4152.61,3899.19 h78.74
  text "100 MIL ROUTER" at 3563.92,3896.69 h78.74
  text "100 MIL ROUTER" at 3576.84,213.49 h78.74
  text "100 MIL ROUTER" at -4201.92,144.59 h78.74
Panel V-Grove:
  lines w5: -3750,0 3750,0 ; -3750,4246.04 3750,4246.04
  text "V-GROOVE" at -4426.76,4188.23 h78.74
  text "PANEL V-GROOVE" at 10897.52,3775.92 h100
  text "V-GROOVE" at 3845.84,-42 h78.74
  text "V-GROOVE" at -4420.76,-43.38 h78.74
Manufacturing Notes:
  text "MANUFACTURING NOTES" at 10897.52,1746.02 h100
Top 3D Models:
  text "TOP 3D MODELS" at 10897.52,2750.97 h100
Bottom 3D Models:
  text "BOTTOM 3D MODELS" at 10897.52,1896.85 h100
Top Courtyard:
  text "TOP COURTYARD" at 10897.52,2921.8 h100
Bottom Courtyard:
  text "BOTTOM COURTYARD" at 10897.52,2238.5 h100
Drill Drawing:
  circle w10: c13602.61,5483.28 r33.33
  circle w10: c13602.61,4583.28 r20
  circle w10: c13602.61,4583.28 r33.33
  lines w10: 13569.28,3816.61 13585.95,3816.61 13602.61,3799.95 13619.28,3816.61 13635.95,3816.61 13619.28,3833.28 13635.95,3849.95 13619.28,3849.95 13602.61,3866.61 13585.95,3849.95 13569.28,3849.95 13585.95,3833.28 13569.28,3816.61 ; 13569.28,3949.95 13569.28,3966.61 13585.95,3983.28 13569.28,3999.95 13569.28,4016.61 13585.95,4016.61 13602.61,3999.95 13619.28,4016.61 13635.95,4016.61 13635.95,3999.95 13619.28,3983.28 13635.95,3966.61 13635.95,3949.95 13619.28,3949.95 13602.61,3966.61 13585.95,3949.95 13569.28,3949.95 ; 13569.28,4166.61 13635.95,4166.61 13602.61,4099.95 13569.28,4166.61 ; 13569.28,4266.61 13585.95,4266.61 13585.95,4249.95 13619.28,4249.95 13619.28,4266.61 13635.95,4266.61 13635.95,4299.95 13619.28,4299.95 13619.28,4316.61 13585.95,4316.61 13585.95,4299.95 13569.28,4299.95 13569.28,4266.61 ; 13569.28,4399.95 13635.95,4399.95 13635.95,4466.61 13569.28,4466.61 13569.28,4399.95 ; 13569.28,4733.28 13602.61,4699.95 13635.95,4733.28 13602.61,4766.61 13569.28,4733.28 ; 13569.28,4849.95 13602.61,4866.61 13635.95,4849.95 13619.28,4883.28 13635.95,4916.61 13602.61,4899.95 13569.28,4916.61 13585.95,4883.28 13569.28,4849.95 ; 13569.28,5066.61 13635.95,5066.61 13602.61,4999.95 13569.28,5066.61 ; 13569.28,5166.61 13585.95,5166.61 13602.61,5149.95 13619.28,5166.61 13635.95,5166.61 13619.28,5183.28 13635.95,5199.95 13619.28,5199.95 13602.61,5216.61 13585.95,5199.95 13569.28,5199.95 13585.95,5183.28 13569.28,5166.61 ; 13569.28,5299.95 13635.95,5299.95 13635.95,5366.61 13569.28,5366.61 13569.28,5299.95 ; 13582.61,3823.28 13592.61,3823.28 13602.61,3813.28 13612.61,3823.28 13622.61,3823.28 13612.61,3833.28 13622.61,3843.28 13612.61,3843.28 13602.61,3853.28 13592.61,3843.28 13582.61,3843.28 13592.61,3833.28 13582.61,3823.28 ; 13582.61,4413.28 13622.61,4413.28 13622.61,4453.28 13582.61,4453.28 13582.61,4413.28 ; 13582.61,5053.28 13622.61,5053.28 13602.61,5013.28 13582.61,5053.28
  lines w15: 13509.49,3754.95 25564.07,3754.95 ; 13509.49,5554.95 25564.07,5554.95 ; 14060.36,3604.95 14060.36,5704.95 ; 14710.19,3604.95 14710.19,5704.95 ; 15859.85,3604.95 15859.85,5704.95 ; 16365.73,3604.95 16365.73,5704.95 ; 17099.53,3604.95 17099.53,5704.95 ; 18289.18,3604.95 18289.18,5704.95 ; 18879.03,3604.95 18879.03,5704.95 ; 19968.72,3604.95 19968.72,5704.95 ; 21998.1,3604.95 21998.1,5704.95 ; 22851.86,3604.95 22851.86,5704.95 ; 24185.47,3604.95 24185.47,5704.95 ; 13509.49,3604.95 25564.07,3604.95 25564.07,5704.95 13509.49,5704.95 13509.49,3604.95
  text "Symbol" at 13599.49,5599.95 h72
  text "Count" at 14105.36,5599.95 h72
  text "Hole Size" at 14755.19,5599.95 h72
  text "Plated" at 15904.85,5599.95 h72
  text "Hole Type" at 16410.73,5599.95 h72
  text "Drill Layer Pair" at 17144.53,5599.95 h72
  text "Via/Pad" at 18334.18,5599.95 h72
  text "Pad Shape" at 18924.03,5599.95 h72
  text "Template" at 20013.72,5599.95 h72
  text "Description" at 22043.1,5599.95 h72
  text "Hole Tolerance (+)" at 22896.86,5599.95 h72
  text "Hole Tolerance (-)" at 24230.47,5599.95 h72
  text "4" at 14105.36,5449.95 h60
  text "19.69mil (0.500mm)" at 14755.19,5449.95 h60
  text "PTH" at 15904.85,5449.95 h60
  text "Slot" at 16410.73,5449.95 h60
  text "Top - Bottom" at 17144.53,5449.95 h60
  text "Pad" at 18334.18,5449.95 h60
  text "Rounded Rectangle" at 18924.03,5449.95 h60
  text "r95_155h50_115r100m100_160(Tol5-5)" at 20013.72,5449.95 h60
  text "1.97mil (0.050mm)" at 22896.86,5449.95 h60
  text "1.97mil (0.050mm)" at 24230.47,5449.95 h60
  text "4" at 14105.36,5299.95 h60
  text "21.65mil (0.550mm)" at 14755.19,5299.95 h60
  text "PTH" at 15904.85,5299.95 h60
  text "Slot" at 16410.73,5299.95 h60
  text "Top - Bottom" at 17144.53,5299.95 h60
  text "Pad" at 18334.18,5299.95 h60
  text "Rounded Rectangle" at 18924.03,5299.95 h60
  text "r125_95h55_85r100m130_100(Tol5-5)" at 20013.72,5299.95 h60
  text "1.97mil (0.050mm)" at 22896.86,5299.95 h60
  text "1.97mil (0.050mm)" at 24230.47,5299.95 h60
  text "4" at 14105.36,5149.95 h60
  text "40.00mil (1.016mm)" at 14755.19,5149.95 h60
  text "PTH" at 15904.85,5149.95 h60
  text "Round" at 16410.73,5149.95 h60
  text "Top - Bottom" at 17144.53,5149.95 h60
  text "Pad" at 18334.18,5149.95 h60
  text "(Mixed)" at 18924.03,5149.95 h60
  text "(Mixed)" at 20013.72,5149.95 h60
  text "4" at 14105.36,4999.95 h60
  text "51.18mil (1.300mm)" at 14755.19,4999.95 h60
  text "PTH" at 15904.85,4999.95 h60
  text "Round" at 16410.73,4999.95 h60
  text "Top - Bottom" at 17144.53,4999.95 h60
  text "Pad" at 18334.18,4999.95 h60
  text "(Mixed)" at 18924.03,4999.95 h60
  text "(Mixed)" at 20013.72,4999.95 h60
  text "4" at 14105.36,4849.95 h60
  text "70.87mil (1.800mm)" at 14755.19,4849.95 h60
  text "PTH" at 15904.85,4849.95 h60
  text "Round" at 16410.73,4849.95 h60
  text "Top - Bottom" at 17144.53,4849.95 h60
  text "Pad" at 18334.18,4849.95 h60
  text "Rounded" at 18924.03,4849.95 h60
  text "c100h180" at 20013.72,4849.95 h60
  text "10" at 14105.36,4699.95 h60
  text "125.98mil (3.200mm)" at 14755.19,4699.95 h60
  text "NPTH" at 15904.85,4699.95 h60
  text "Round" at 16410.73,4699.95 h60
  text "Top - Bottom" at 17144.53,4699.95 h60
  text "Pad" at 18334.18,4699.95 h60
  text "Rounded" at 18924.03,4699.95 h60
  text "c320hn320" at 20013.72,4699.95 h60
  text "12" at 14105.36,4549.95 h60
  text "40.16mil (1.020mm)" at 14755.19,4549.95 h60
  text "PTH" at 15904.85,4549.95 h60
  text "Round" at 16410.73,4549.95 h60
  text "Top - Bottom" at 17144.53,4549.95 h60
  text "Pad" at 18334.18,4549.95 h60
  text "(Mixed)" at 18924.03,4549.95 h60
  text "(Mixed)" at 20013.72,4549.95 h60
  text "16" at 14105.36,4399.95 h60
  text "62.99mil (1.600mm)" at 14755.19,4399.95 h60
  text "PTH" at 15904.85,4399.95 h60
  text "Round" at 16410.73,4399.95 h60
  text "Top - Bottom" at 17144.53,4399.95 h60
  text "Pad" at 18334.18,4399.95 h60
  text "Rounded" at 18924.03,4399.95 h60
  text "c240h160" at 20013.72,4399.95 h60
  text "24" at 14105.36,4249.95 h60
  text "42.91mil (1.090mm)" at 14755.19,4249.95 h60
  text "PTH" at 15904.85,4249.95 h60
  text "Round" at 16410.73,4249.95 h60
  text "Top - Bottom" at 17144.53,4249.95 h60
  text "Pad" at 18334.18,4249.95 h60
  text "Rounded" at 18924.03,4249.95 h60
  text "c152h109m163" at 20013.72,4249.95 h60
  text "70" at 14105.36,4099.95 h60
  text "10.00mil (0.254mm)" at 14755.19,4099.95 h60
  text "PTH" at 15904.85,4099.95 h60
  text "Round" at 16410.73,4099.95 h60
  text "Top - Bottom" at 17144.53,4099.95 h60
  text "(Mixed)" at 18334.18,4099.95 h60
  text "Rounded" at 18924.03,4099.95 h60
  text "(Mixed)" at 20013.72,4099.95 h60
  text "488" at 14105.36,3949.95 h60
  text "39.37mil (1.000mm)" at 14755.19,3949.95 h60
  text "PTH" at 15904.85,3949.95 h60
  text "Round" at 16410.73,3949.95 h60
  text "Top - Bottom" at 17144.53,3949.95 h60
  text "Pad" at 18334.18,3949.95 h60
  text "(Mixed)" at 18924.03,3949.95 h60
  text "(Mixed)" at 20013.72,3949.95 h60
  text "728" at 14105.36,3799.95 h60
  text "11.81mil (0.300mm)" at 14755.19,3799.95 h60
  text "PTH" at 15904.85,3799.95 h60
  text "Round" at 16410.73,3799.95 h60
  text "Top - Bottom" at 17144.53,3799.95 h60
  text "Via" at 18334.18,3799.95 h60
  text "Rounded" at 18924.03,3799.95 h60
  text "v50h30" at 20013.72,3799.95 h60
  text "1368 Total" at 14105.36,3649.95 h60
  text "DRILL DRAWING" at 10897.52,3605.1 h100
  text "Slot definitions :" at 13599.49,3504.97 h60
  text "Routed Path Length" at 14632.18,3504.97 h60
  text "= Calculated from tool start centre position to tool end centre position." at 15734.84,3504.97 h60
  text "Hole Length" at 14632.18,3405 h60
  text "= Routed Path Length + Tool Size = Slot length as defined in the PCB layout" at 15324.98,3405 h60

## Panel: embedded boards
"HIVE_SIGHT.PcbDoc" at -2805.91,0, 1 rows x 2 columns, spacing 2500 x 2855.91, rotation 0

## Text inside footprints (layer, text, board x,y; h text height)
Designator19: Top Paste "TOP" at 5895,-2208.28 h100; Top Paste "Half-Etched  / Lasered Text / DO NOT REMOVE" at 6947.22,-3127.23 h150; Top Paste "VALID AREA - 240 x 340 mm" at -3133.45,-2941.49 h255.91; Top Paste "STENCIL THICKNESS -" at 5716.22,-2046.23 h35; Top Paste "FRAME SIZE - 420 x 520 mm" at -3033.45,8658.51 h255.91; Top Paste "TOP" at 6937.97,-5701.98 h255; Top Paste "PCB Revision" at 2146.97,-5701.98 h255; Top Paste "STENCIL THICKNESS -" at -2932.17,-4444.78 h255.91; Top Paste "PCB Revision" at 5906.97,-1961.98 h35
Designator41: Top "1" at -277.96,-410.74 h78.74; Manufacturing Notes "Preserve Stacking Stripes Integrity during Router Tooling" at -255.32,-806.41 h39.37
Designator42: Bottom "4" at -19.38,-410.74 h78.74
Designator45: GND "2" at -186.5,-415.67 h78.74
Designator49: PWR "3" at -96.81,-415.59 h78.74
FID1: Top Paste "STENCIL / FIDUCIAL / HALF-ETCHED" at -3326.14,-349.42 h30; Bottom Paste "STENCIL / FIDUCIAL / HALF-ETCHED" at -3006.14,-349.42 h30
FID2: Top Paste "STENCIL / FIDUCIAL / HALF-ETCHED" at 2761.16,4496.59 h30; Bottom Paste "STENCIL / FIDUCIAL / HALF-ETCHED" at 3081.16,4496.59 h30
FID3: Top Paste "STENCIL / FIDUCIAL / HALF-ETCHED" at 2755.49,-349.42 h30; Bottom Paste "STENCIL / FIDUCIAL / HALF-ETCHED" at 3075.49,-349.42 h30